# Altium PCB drv8886_breakout.PcbDoc
Units mil, origin at the board's own origin, x right, y up, seen from the top; angles counter-clockwise.
Board outline 1915 x 1490 mil, 2 copper layers (Top Layer, Bottom Layer); 19 components, 22 nets, 69 pads, 10 vias.
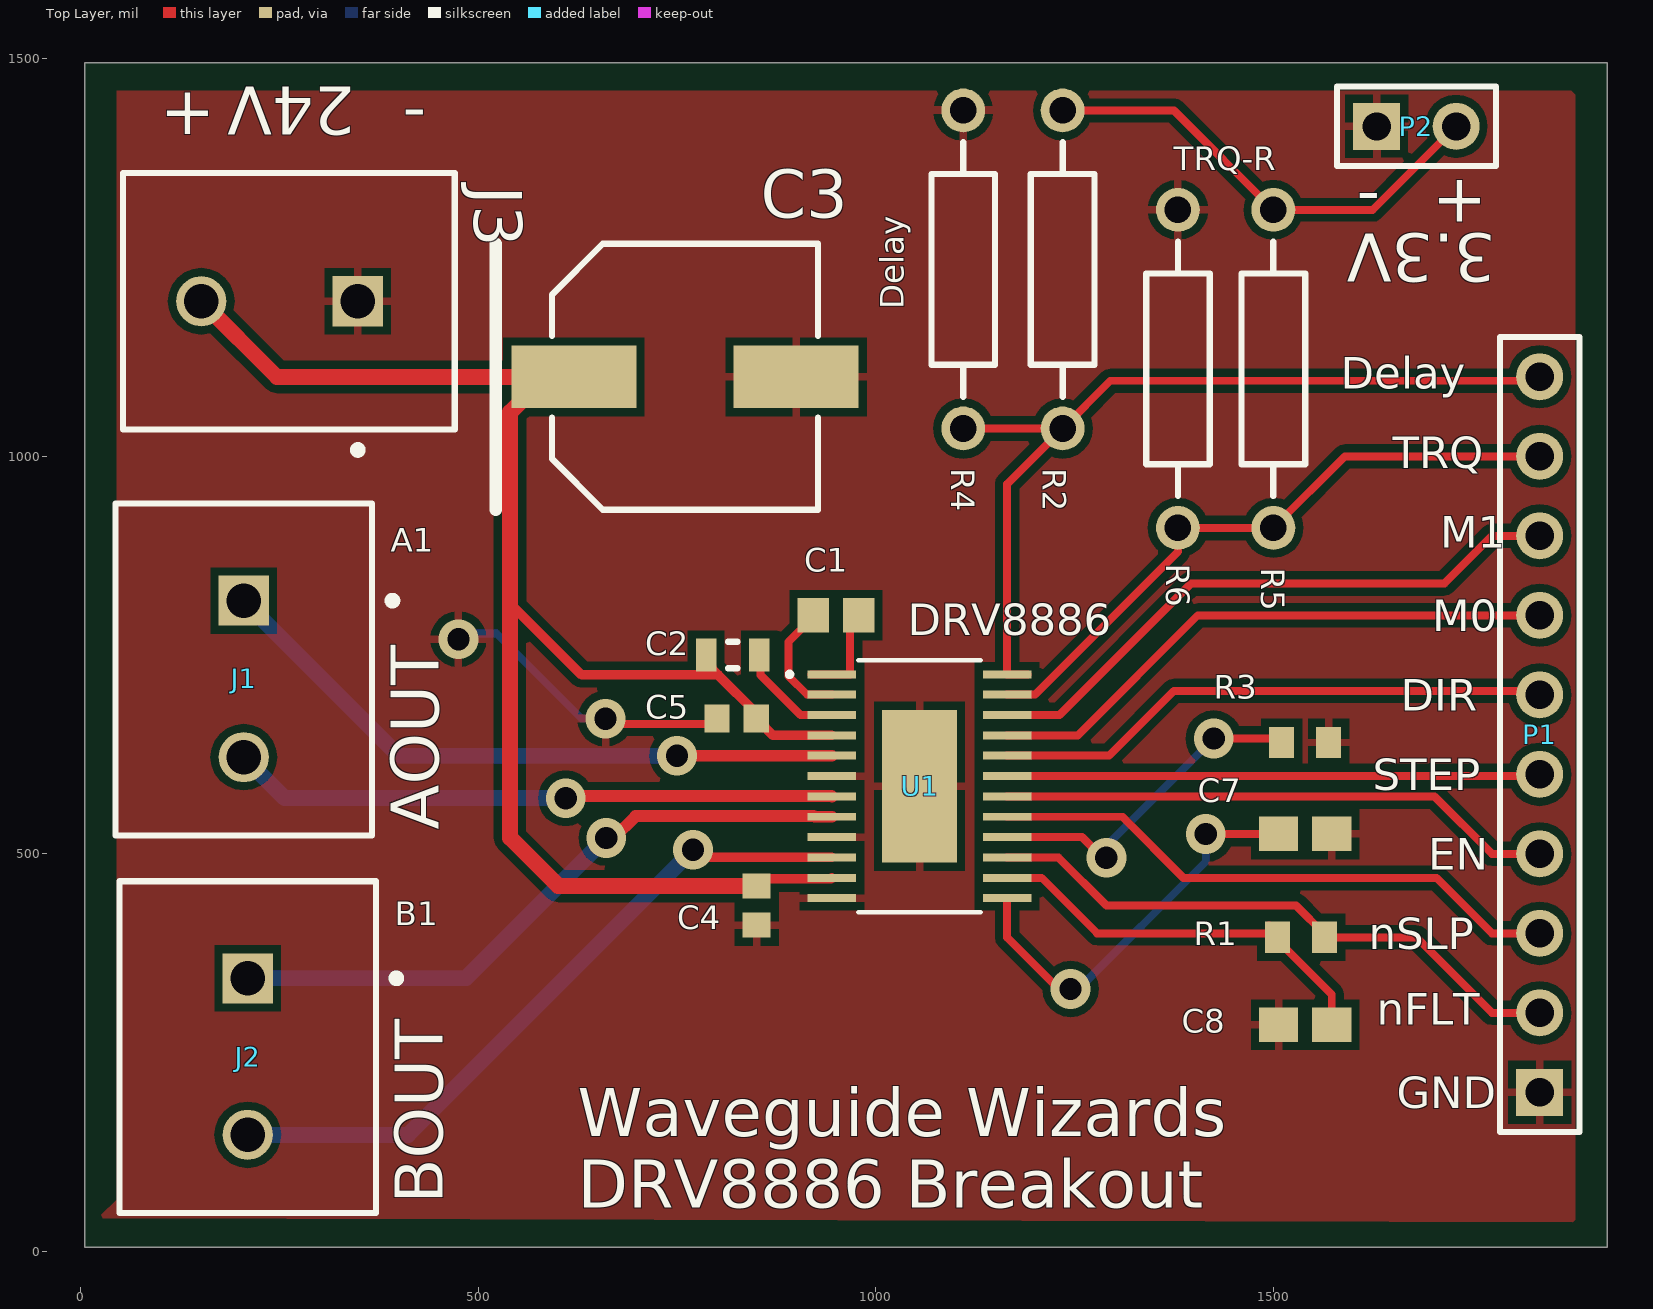
[diagram p0: Top Layer view]
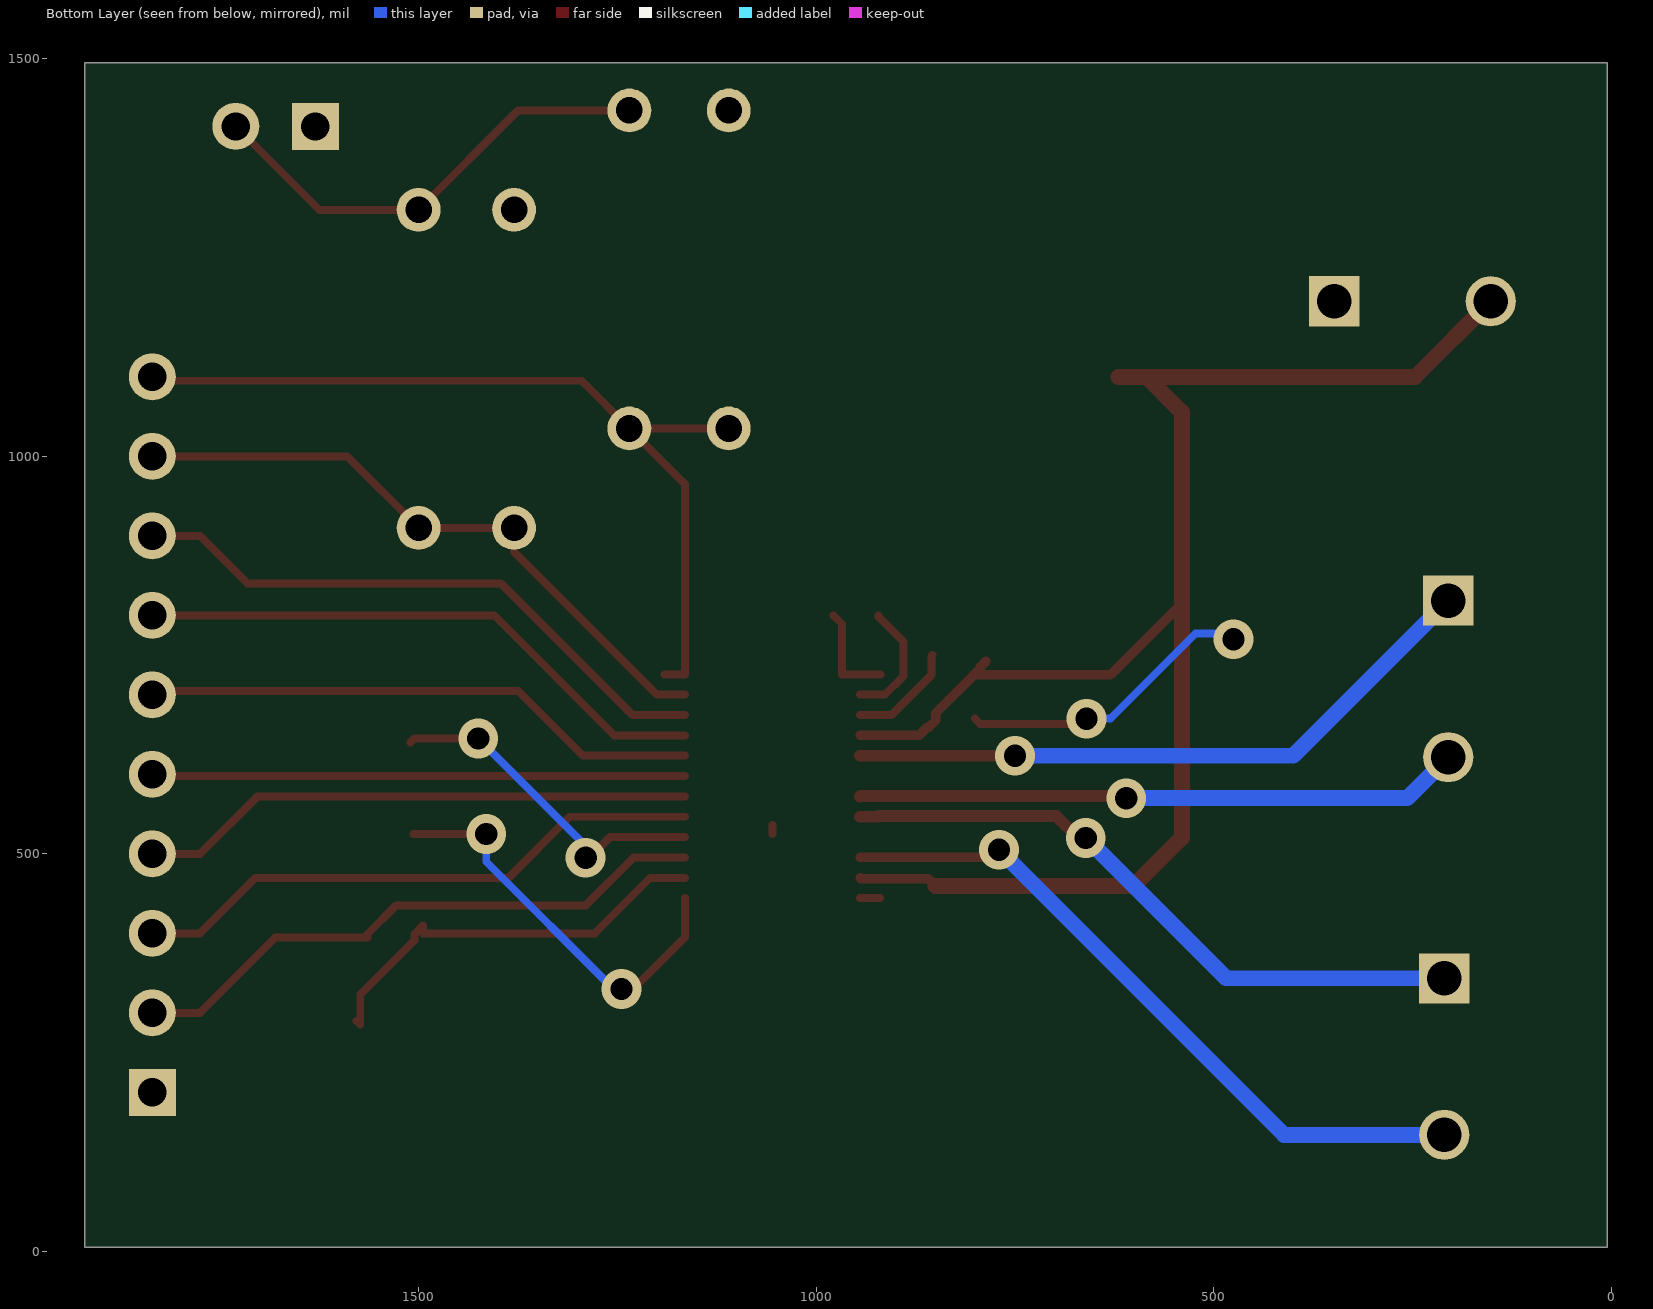
[diagram p1: Bottom Layer view, seen from below]

## Layer stack, top to bottom
Top Solder: solder mask 0.4, Solder Resist, Dk 3.5
Top Layer: signal copper 1.4
Dielectric 1: dielectric 12.6, FR-4, Dk 4.8
Bottom Layer: signal copper 1.4
Bottom Solder: solder mask 0.4, Solder Resist, Dk 3.5

## Board outline
5,5 5,1495 1920,1495 1920,5

## Design rules (kind name [scope] priority, off if disabled: settings)
Clearance [All] p1: gap=10 ignorepadtopadclearanceinfootprint=FALSE except(0: Arc-Hole Track-Hole SMDPad-Hole THPad-Hole Via-Hole Fill-Hole Poly-Hole Region-Hole Text-Hole)
PolygonConnect [All] p1: connectstyle=Relief reliefconductorwidth=10 reliefentries=4 polygonreliefangle="90 Angle" airgapwidth=10
RoutingVias [All] p1: holewidth=28 width=50 viastyle="Through Hole" minholewidth=28 minwidth=50 maxholewidth=28 maxwidth=50
SolderMaskExpansion [All] p1: expansion=4
Width [All] p1 off: maxlimit=10 minlimit=10 preferedwidth=10
30 further rules are at their usual default settings.

## Classes and differential pairs
component class drv8886_breakout: C1 C2 C3 C4 C5 C7 C8 J2 J3 P1 P2 R1 R2 R3 R4 R5 R6 U1

## Components (designator, comment, footprint, x,y, rotation, side; value= is the part's Value field where it differs from the comment)
C1 "0.022uF" CAPC1608X87X35ML15T15 950,800 r0 top
C2 "0.22uF" TDK-C1608-2_A_M 820,750 r0 top
C3 "100uF" PNSC-FK-V-F_V 760,1100 r0 top
C4 "0.01uF" CAPC1608X87X35LL15T15 850,435 r270 top
C5 "0.01uF" CAPC1608X87X35LL15T15 825,670 r180 top
C7 "0.47uF" CAPC1608X90X35ML15T15 1540,525 r180 top
C8 "0.47uF" CAPC1608X90X35ML15T15 1540,285 r0 top
J1 "282836-2" TECO-282836-2_V 205,720 r270 top
J2 "282836-2" TECO-282836-2_V 210,245 r270 top
J3 "282836-2" TECO-282836-2_V 250,1195 r180 top
P1 "Header 10" HDR1X10 1835,200 r90 top
P2 "Header 2" HDR1X2 1630,1415 r0 top
R1 "5k" RESC1608X55X25ML10T15 1535,395 r0 top
R2 "?" AXIAL-0.4 1235,1235 r90 top value=1K
R3 "15k" RESC1608X55X25ML10T15 1540,640 r180 top
R4 "Res2" AXIAL-0.4 1110,1235 r270 top value=1K
R5 "?" AXIAL-0.4 1500,1110 r90 top value=1K
R6 "Res2" AXIAL-0.4 1380,1110 r270 top value=1K
U1 "Part Number: DRV8886ATPWP" PWP0024B_N 1055,585 r0 top value=Value

## Footprints (in the part's own frame and the unit in brackets; to place one, negate y for a bottom-side part, rotate by r counter-clockwise, add the part's x,y. Pads: shape width x height; smd on the part's side, far side on the other; paste and mask are expansions set on the pad)
AXIAL-0.4 [mm] "Axial Device, Thru-Hole; 2 Leads; 0.4 in Pin Spacing"
  round 1.4 hole 0.85: 1(-5.08,0) 2(5.08,0)
  silkscreen extent -4.06,-1.02 4.06,1.02
CAPC1608X87X35LL15T15 [mm] "Chip Capacitor, 2-Leads, Body 1.60x0.80mm, IPC High Density"
  rect 0.8x0.9 smd: 1(-0.625,0) 2(0.625,0)
  body extent -0.87,-0.48 0.87,0.48, height 0.87
CAPC1608X87X35ML15T15 [mm] "Chip Capacitor, 2-Leads, Body 1.60x0.80mm, IPC Low Density"
  rect 1x1.1 smd: 1(-0.725,0) 2(0.725,0)
  body extent -0.87,-0.48 0.87,0.47, height 0.87
CAPC1608X90X35ML15T15 [mm] "Chip Capacitor, 2-Leads, Body 1.60x0.81mm, IPC Low Density"
  rect 1.25x1.1 smd: 1(-0.85,0) 2(0.85,0)
  body extent -0.88,-0.48 0.87,0.48, height 0.9
HDR1X2 [mm] "Connector; Header; 2 Position"
  rect 1.5x1.5 hole 0.9: 1(0,0)
  round 1.5 hole 0.9: 2(2.54,0)
  silkscreen extent -1.27,-1.27 3.81,1.27
HDR1X10 [mm] "Connector; Header; 10 Position"
  rect 1.5x1.5 hole 0.9: 1(0,0)
  round 1.5 hole 0.9: 2(2.54,0) 3(5.08,0) 4(7.62,0) 5(10.16,0) 6(12.7,0) 7(15.24,0) 8(17.78,0) 9(20.32,0) 10(22.86,0)
  silkscreen extent -1.27,-1.27 24.13,1.27
PNSC-FK-V-F_V [mm] "CAPAE, 2-Leads, Body 8.50x8.50mm"
  rect 4x2 smd: 1(-3.55,0) 2(3.55,0)
  silkscreen extent -6.05,-4.25 4.25,4.25, body extent -5,-4.25 5,4.25, height 10.5
PWP0024B_N [mil]
  rect 61x10 smd paste+0 mask+2: 1(-110.24,140.75) 2(-110.24,115.16) 3(-110.24,89.57) 4(-110.24,63.98) 5(-110.24,38.39) 6(-110.24,12.8) 7(-110.24,-12.8) 8(-110.24,-38.39) 9(-110.24,-63.98) 10(-110.24,-89.57) 11(-110.24,-115.16) 12(-110.24,-140.75) 13(110.24,-140.75) 14(110.24,-115.16) 15(110.24,-89.57) 16(110.24,-63.98) 17(110.24,-38.39) 18(110.24,-12.8) 19(110.24,12.8) 20(110.24,38.39) 21(110.24,63.98) 22(110.24,89.57) 23(110.24,115.16) 24(110.24,140.75)
  rect 94x192 smd paste-95.5 mask+3: 25(0,0)
  silkscreen extent -167,-158 77,158, body extent 0,0 10,10, height 10
RESC1608X55X25ML10T15 [mm] "Chip Resistor, 2-Leads, Body 1.60x0.80mm, IPC Low Density"
  rect 0.8x1 smd: 1(-0.75,0) 2(0.75,0)
  body extent -0.85,-0.45 0.85,0.45, height 0.55
TDK-C1608-2_A_M [mm] "Chip Capacitor, 2-Leads, Body 1.7x0.9mm, IPC Low Density"
  rect 0.65x1.05 smd: 1(-0.85,0) 2(0.85,0)
  silkscreen extent -0.15,-0.42 0.15,0.42, body extent -0.85,-0.45 0.85,0.45, height 0.9
TECO-282836-2_V [mm] "Female Header, Pitch 5mm, 1 x 2 Position, Height 10mm"
  rect 1.6x1.6 hole 1.1: 1(-2.5,0)
  round 1.6 hole 1.1: 2(2.5,0)
  silkscreen extent -5.6,-4.1 5,4.88, body extent -5.6,-4.1 5,4.1, height 10

## Part data
C1: library part CMP-2006-03139-1, Manufacturer=Kemet, Part Number=C0603C223K4RACTU
C2: library part CMP-2000-05394-1, "Cap Ceramic, 0.22 uF, +/- 10%, -55 to 125 degC, 2-Pin SMD (0603), RoHS, Tape and Reel", Capacitance=0.22µF, Manufacturer=TDK, Operating Temperature=-55degC~125degC, Package / Case=0603(1608Metric), Package Description="2-Pin Chip Capacitor, Body 1.7 x 0.9 mm", Package Reference=603, PCN Part Number=MLCCPartNumberChange30/Nov/2012, Ratings=-, Standard Package=1, Temperature Coefficient=X7R, Tolerance=±10%, Voltage - Rated=50V, Applications=GeneralPurpose, Category=Capacitors, Datasheet URL=https://datasheet.ciiva.com/24218/c1608x7r1h224k080ab-264841-24218813.pdf, Datasheet Version=Sep-13, Design Resources=20WNon-IsolatedBuckLEDDriverUsingPLLNK460KG, Family=CeramicCapacitors, Features=-, Height - Seated (Max)=-, Kits=445-9014-KIT-ND-KITMLCC100PF-22UF060310-50V445-9003-KIT-ND-KITCAPCERHICAPMLCCSMD445-173086-KIT-ND-C0402-2220X7R6.3-50V1,000PF-, Lead Spacing=-, Lead Style=-, Manufacturer URL=http://www.tdk.com/, Mounting Type=SurfaceMount,MLCC, Online Catalog=CSeries,GeneralPurpose, Other Names=445-7408-1, Packaging=CutTape(CT), Product Training Modules=CSeriesGeneralApplicationsSEAT,CCV,andTVCLDesignToolsGuidetoReplacinganElectrolyticCapacitorwithanMLCC, RoHS Information=RoHSCertificate-MLCC, Series=C, Size / Dimension="0.063\"Lx0.031\"W(1.60mmx0.80mm)", Thickness (Max)="0.035\"(0.90mm)"
C3: library part CMP-2000-06208-1, "Aluminum Electrolytic Capacitor, 100 uF, +/- 20%, 50 V, 2-Pin SMD (Size Code F), -55 to 105 degC, RoHS, Tape and Reel", Capacitance=100µF, Case Size/Dimension=Ø8x10.2mm, Lifetime@Temperature=2000Hrs@105°C, Manufacturer=Panasonic, Operating Temp-Max=105°C, Operating Temp Range=-55to+105°C, Package Description="2-Pin Electrolytic Aluminum Capacitor, Body 8.3 x 8.3 mm", Package Reference=FK-V-F, Rated Voltage=50V, Ripple Current=350mA, Datasheet URL=http://industrial.panasonic.com/cdbs/www-data/pdf/RDE0000/ABA0000C1181.pdf, Datasheet Version=03/2016, Impedance=0.34O, Manufacturer URL=http://www.panasonic.com/, Mounting Technology=SurfaceMount, Package URL=http://industrial.panasonic.com/cdbs/www-data/pdf/RDE0000/DME0000COL48.pdf, Series=FK, Type=Can
C4 C5: library part CMP-2006-03299-1, Manufacturer=Kemet, Part Number=C0603X103K5RACTU
C7 C8: library part CMP-2006-04187-1, Manufacturer="AVX Interconnect / Elco", Part Number=06033C474KAT2A
J1 J2 J3: library part CMP-1684-00017-1, "Female Header, Pitch 5 mm, 1 x 2 Position, Height 10 mm, Tail Length 3.5 mm, Rohs, Bulk", Color=Green, Current=13.5A, Manufacturer="TE Connectivity", Package Description="Female Header, Pitch 5 mm, 1 x 2 Position, Height 10 mm, Tail Length 3.5 mm", Package Reference=THD, Standard Package=300, Voltage=300V, 3D Model=282836-2.pdf, Category=Connectors,Interconnects, Clamp Material - Plating=Brass-NickelPlated, Contact Material - Plating=Brass-TinPlated, Datasheet URL=http://www.te.com.cn/commerce/DocumentDelivery/DDEController?Action=showdoc&DocId=Catalog+Section%7F1308389_EUROSTYLE_TERMINAL_BLOCKS%7F0607%7Fpdf%7FEnglish%7FENG_CS_1308389_EUROSTYLE_TERMINAL_BLOCKS_0607.pdf%7F282836-2, Dynamic Catalog=BuchananSeries, Family=TerminalBlocks-WiretoBoard, Featured Product=EurostyleTerminalBlockConnectors, Features=Interlocking(Side), Housing Material=Polyamide(PA66),Nylon6/6, Manufacturer URL=http://www.te.com, Mating Orientation=HorizontalwithBoard, Mounting Type=ThroughHole, Number of Levels=1, Other Names="5ULV-02B / A98076", Packaging=Bulk, Pitch="0.197\"(5.00mm)", Positions Per Level=2, Product Training Modules=Wire-to-BoardEurostyleTerminalBlocks, RoHS Information=282836-2StatementofCompliance, Screw Material - Plating=Brass-NickelPlated, Screw Thread=M3, Series=Buchanan, Torque - Screw=0.68Nm(6Lb-In), Wire Gauge=16-30AWG, Wire Termination=Screw-RisingCageClamp
P1: "Header, 10-Pin", LatestRevisionDate=17-Jul-2002, LatestRevisionNote="Re-released for DXP Platform.", Publisher="Altium Limited"
P2: "Header, 2-Pin", LatestRevisionDate=17-Jul-2002, LatestRevisionNote="Re-released for DXP Platform.", Publisher="Altium Limited"
R1 R3: library part CMP-2100-03667-1, "Chip Resistor, 0 Ohm, +/- 5%, 0.1 W, -55 to 155 degC, 0603 (1608 Metric), RoHS, Tape and Reel", Case/Package=0603, Case Code (Metric)=1608, Manufacturer=Yageo, Max Operating Temperature=155degC, Min Operating Temperature=-55degC, Package Description="2-Pin Surface Mount Device, Body 1.6 x 0.8 mm", Package Quantity=5000, Power Rating=100mW, Resistance=0mOhm, Temperature Coefficient=200ppm/degreesC, Tolerance=5%, Voltage Rating=50V, Case Code (Imperial)=0603, Composition=ThickFilm, Contact Plating=Tin, Datasheet URL=http://www.yageo.com/NewPortal/yageodocoutput?fileName=/pdf/R-Chip/PYu-RC_Group_51_RoHS_L_5.pdf, Datasheet Version="Rev. 5, 10/2016", Depth=0.8mm, Height=0.45mm, Lead Free=LeadFree, Length=1.6mm, Manufacturer URL=http://www.yageo.com/, Military Standard=Not, Number of Pins=2, Package Reference=0603, Packaging=TapeandReel, Radiation Hardening=No, REACH SVHC=NoSVHC, RoHSCompliant=true, Termination=SMD/SMT, Voltage Rating (DC)=50V, Width=0.8mm
R2 R5: library part Res2, "Resistor", LatestRevisionDate=17-Jul-2002, LatestRevisionNote="Re-released for DXP Platform.", PackageDescription="Axial Device, Thru-Hole; 2 Leads; 0.4 in Pin Spacing", PackageReference=AXIAL-0.4, Published=8-Jun-2000, Publisher="Altium Limited"
R4 R6: "Resistor", LatestRevisionDate=17-Jul-2002, LatestRevisionNote="Re-released for DXP Platform.", PackageDescription="Axial Device, Thru-Hole; 2 Leads; 0.4 in Pin Spacing", PackageReference=AXIAL-0.4, Published=8-Jun-2000, Publisher="Altium Limited"
U1: library part DRV8886ATPWP, "No Description Available", Built_By=EMA_Jessica, Copyright="Copyright (C) 2018 Accelerated Designs. All rights reserved", Manufacturer_Part_Number=DRV8886ATPWP, RefDes=RefDes, Type=DEV, Vendor="Texas Instruments"

## Via types
v1: diameter 50, hole 28, Top Layer to Bottom Layer, 10 vias

## Nets (pads, with @x,y where several pads share a name; then routed paths per layer and width w, separated by ;. In a path a pad name is that pad's centre, name@x,y a point inside that pad or via, vN(x,y) a via of type N, cw(c..) or ccw(c..) an arc to the next point about the centre after c; other vN are vias at no path point)
3V3: P2.2 R2.2 R5.2 | length 590.3
  Top Layer w10: R2.2 1375,1435 R5.2 1625,1310 P2.2
\FAULT: P1.2 R1.2 U1.15 | length 753
  Top Layer w10: U1.15 1229.57,495.43 1290,435 1528.46,435 1564.53,398.94 R1.2 1680,395 1775,300 P1.2
\SLEEP: P1.3 U1.17 | length 730.5
  Top Layer w10: U1.17 1310.13,546.61 1387.14,469.61 1705.39,469.61 1775,400 P1.3
AOUT1: J1.1 U1.5 | length 820.6
  Top Layer w10: v1(750,623.39) v1@760.82,623.39
  Top Layer w15: v1@760.82,623.39 U1.5
  Bottom Layer w20: J1.1 400.04,623.39 v1(750,623.39)
AOUT2: J1.2 U1.7 | length 762.3
  Top Layer w15: v1(610,570) 612.5,572.5 944.47,572.5 U1.7
  Bottom Layer w20: J1.2 256.57,570 v1(610,570)
BOUT1: J2.2 U1.10 | length 887.2
  Top Layer w12: v1(770,505) 779.57,495.43 U1.10
  Bottom Layer w20: J2.2 411.57,146.57 v1(770,505)
BOUT2: J2.1 U1.8 | length 837.4
  Top Layer w10: v1(661.02,520) v1@664.36,520
  Top Layer w15: v1@664.36,520 670.49,520 697.99,547.5 921.76,547.5 922.65,546.61 U1.8
  Bottom Layer w15: J2.1 216.57,350 J2.1@225,350
  Bottom Layer w20: J2.1 484.45,343.43 v1(661.02,520)
CPH: C1.1 U1.2 | length 153.8
  Top Layer w10: C1.1 921.46,798.03 890,766.58 890,723.8 913.64,700.16 U1.2
CPL: C1.2 U1.1 | length 127
  Top Layer w10: U1.1@919.26,725.75 U1.1 967.35,725.75 967.35,788.81 C1.2
Decay: P1.10 R2.1 R4.2 U1.24 | length 1115.6
  Top Layer w10: R4.2 R2.1 ; U1.24@1190.74,725.75 U1.24 1165.24,965.24 R2.1 ; P1.10 1830,1095 1295,1095 R2.1
DIR: P1.6 U1.20 | length 705.6
  Top Layer w10: U1.20 1293.39,623.39 1375,705 1830,705 P1.6
ENABLE: P1.4 U1.18 | length 699.7
  Top Layer w10: U1.18 1702.8,572.2 1775,500 P1.4
GND: C3.2 C4.2 C5.2 C7.1 C8.1 J3.1 P1.1 P2.1 R3.1 R4.1 R6.1 U1.6 U1.9 U1.12 U1.25 | length 414.1
  Top Layer w10: v1(660,670) 666.61,663.39 793.78,663.39 C5.2 ; U1.12@920,444.25 U1.12 ; U1.25@1055,525 U1.25@1055,536
  Bottom Layer w10: v1(475,770) 490.31,770 497.65,777.35 522.65,777.35 630,670 v1(660,670)
M0: P1.7 U1.21 | length 732.3
  Top Layer w10: U1.21 1253.98,648.98 1405,800 P1.7
M1: P1.8 U1.22 | length 763.1
  Top Layer w10: U1.22 1231.1,674.57 1396.54,840 1715,840 1775,900 P1.8
NetC7_2: C7.2 U1.13 | length 518.9
  Top Layer w10: U1.13 1165.24,394.76 1230,330 v1(1245,330) ; v1(1415,525) C7.2
  Bottom Layer w10: v1(1245,330) 1255,330 1415,490 v1(1415,525)
NetC8_2: C8.2 R1.1 U1.14 | length 532.5
  Top Layer w10: U1.14 1208.58,469.84 1278.43,400 1494.72,400 1494.72,409.69 1505.47,398.94 R1.1 1505.47,391.06 1573.46,323.07 C8.2 C8.2@1578.46,290
NetR3_2: R3.2 U1.16 | length 429
  Top Layer w10: U1.16 1259.46,521.02 1285.48,495 v1(1290,495) ; v1(1425,645) 1505.47,645 R3.2
  Bottom Layer w10: v1(1290,495) 1290,510 v1(1425,645)
STEP: P1.5 U1.19 | length 670.7
  Top Layer w10: U1.19 1832.8,597.8 P1.5
TRQ: P1.9 R5.1 R6.2 U1.23 | length 811.5
  Top Layer w10: U1.23 1200.16,700.16 1380,880 R6.2 R5.1 1590,1000 P1.9
VCP: C2.2 U1.3 | length 136.3
  Top Layer w10: C2.2 855,748.46 855,725 905.43,674.57 U1.3
VM: C2.1 C3.1 C4.1 C5.1 J3.2 U1.4 U1.11 | length 2042
  Top Layer w12: 540,815 630,725 801.49,725 ; C2.1@786.54,742.13 793.33,735.33 793.33,733.15 801.49,725 ; C4.1 859.24,468.84 943.76,468.84 U1.11 ; U1.4 870.63,648.98 861.32,658.28 859.35,658.28 849.61,668.03 C5.1 849.61,676.88 801.49,725
  Top Layer w20: J3.2 246.81,1099.76 C3.1@584.13,1099.76 ; C3.1@620,1099.76 C3.1@584.13,1099.76 ; C4.1 600.39,459.61 540,520 540,815 540,1055.63 C3.1@584.13,1099.76

## Polygon pours and split planes (outlines as drawn)
GND on Top Layer "GND" (solid, remove dead copper, pour order 16): 21.4,41.4 45,65 45,1460 1875,1460 1880,1455 1880,36.35

## Silkscreen, mask and mechanical layers (free items; w line width, h text height)
Top Overlay:
  text "24V" at 345,1465 h60 r180
  text "-" at 405,1410 h60
  text "+" at 100,1405 h60
  text "TRQ-R" at 1375,1360 h30
  text "-" at 1605,1305 h60
  text "+" at 1700,1295 h60
  text "3.3V" at 1780,1280 h60 r180
  text "Delay" at 1035,1185 h30 r90
  text "Delay" at 1585,1085 h40
  text "TRQ" at 1650,985 h40
  text "M1" at 1710,885 h40
  text "A1" at 390,880 h30
  text "M0" at 1700,780 h40
  text "DRV8886" at 1040,775 h40
  text "DIR" at 1660,680 h40
  text "STEP" at 1625,580 h40
  text "AOUT" at 450,530 h60 r90
  text "EN" at 1695,480 h40
  text "B1" at 395,410 h30
  text "nSLP" at 1620,380 h40
  text "nFLT" at 1630,285 h40
  text "GND" at 1655,180 h40
  text "BOUT" at 455,60 h60 r90
  text "Waveguide Wizards / DRV8886 Breakout" at 625,55 h60